# EAGLE board eeZeeSwitch (EAGLE 6.4)
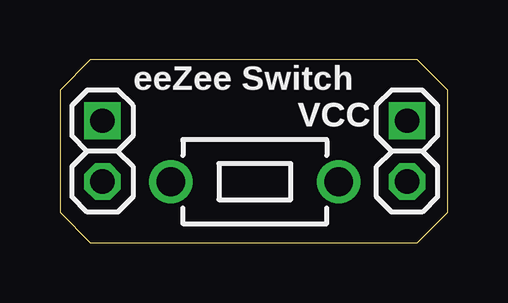
[diagram p0: board, top side]
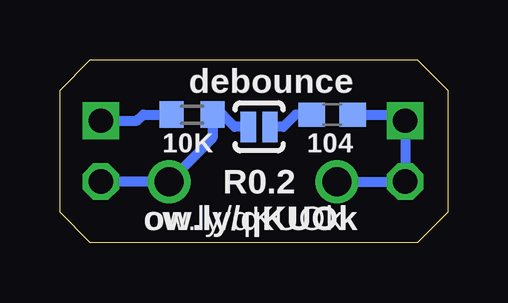
[diagram p1: board, bottom side, seen from below]

Size 16.18 x 7.61 mm. Coordinates in mm from the lower left corner, seen from the top.
Outline: 0,6.34 0,1.27 1.27,0 14.91,0 16.18,1.27 16.18,6.34 14.91,7.61 1.27,7.61 0,6.34
Copper layers (1*16): Top 0.0356mm / dielectric 1.5011mm / Bottom 0.0356mm
Design rules "LaenPCBOrder *": minimum track width 6mil, minimum drill 13mil, track to track 6mil, track to pad 6mil, pad to pad 6mil, via to via 6mil, smd to smd 6mil, copper to edge 10mil, drill to drill 6mil, minimum pad ring 7mil, minimum via ring 7mil, stop-mask expansion 4mil, vias tented up to drill 20mil, thermal gap 10mil

## Footprints (pad centres in the part's own frame; a part is rotated, then mirrored left to right if it is on the bottom)
C0603 = smd 1.1 x 1: 1 -0.85,0; 2 0.85,0
1X02-S = drill 1.016 square: 1 -1.27,0 | drill 1.016 octagon: 2 1.27,0
R0603 = smd 1 x 1.1: 1 -0.85,0; 2 0.85,0
6MMTACTILE_RECT = drill 1.2: P$1 -3.5,0; P$2 3.5,0
SJ_2S-NO = smd 0.635 x 1.27: 1 -0.45,0; 2 0.45,0

## Placement (x,y rotation side)
C1  104  [C0603]  4.83,5.33 0 bottom
JP1  [1X02-S]  14.48,3.81 270 top
JP2  [1X02-S]  1.78,3.81 270 top
R1  10K  [R0603]  10.67,5.33 180 bottom
S1  eeZee Switch  [6MMTACTILE_RECT]  8.13,2.54 0 top
SJ1  debounce  [SJ_2S-NO]  7.87,4.83 180 bottom

## Library data of the parts
C1 R1 = rcl
JP1 JP2 = pinhead-2
S1 = bt_electromech
SJ1 = SparkFun

## Nets
N$1: JP1.2 R1.1 S1.P$2 SJ1.2
N$2: C1.2 JP2.1 JP2.2 S1.P$1
N$3: JP1.1 R1.2
N$4: C1.1 SJ1.1

## Tracks (layer width: path | path; a pad name or v marks a point on that pad's centre or on a via)
N$1
  Bottom 0.406: JP1.2 S1.P$2 9.82,4.35 R1.1 9.4,5.33 8.89,4.83 SJ1.2
N$2
  Bottom 0.406: S1.P$1 JP2.2 JP2.1 2.03,5.33 C1.2
N$3
  Bottom 0.406: JP1.1 12.95,5.08 12.7,5.33 R1.2
N$4
  Bottom 0.406: C1.1 6.35,5.33 6.86,4.83 SJ1.1

## Text on the board
tPlace: VCC
bPlace: ow.ly/qKUOk
bNames: R0.2
tsilk: eeZee Switch | VCC
bsilk: debounce | 104 | 10K | R0.2 | ow.ly/qKUOk